# EAGLE board tenso (EAGLE 6.4)
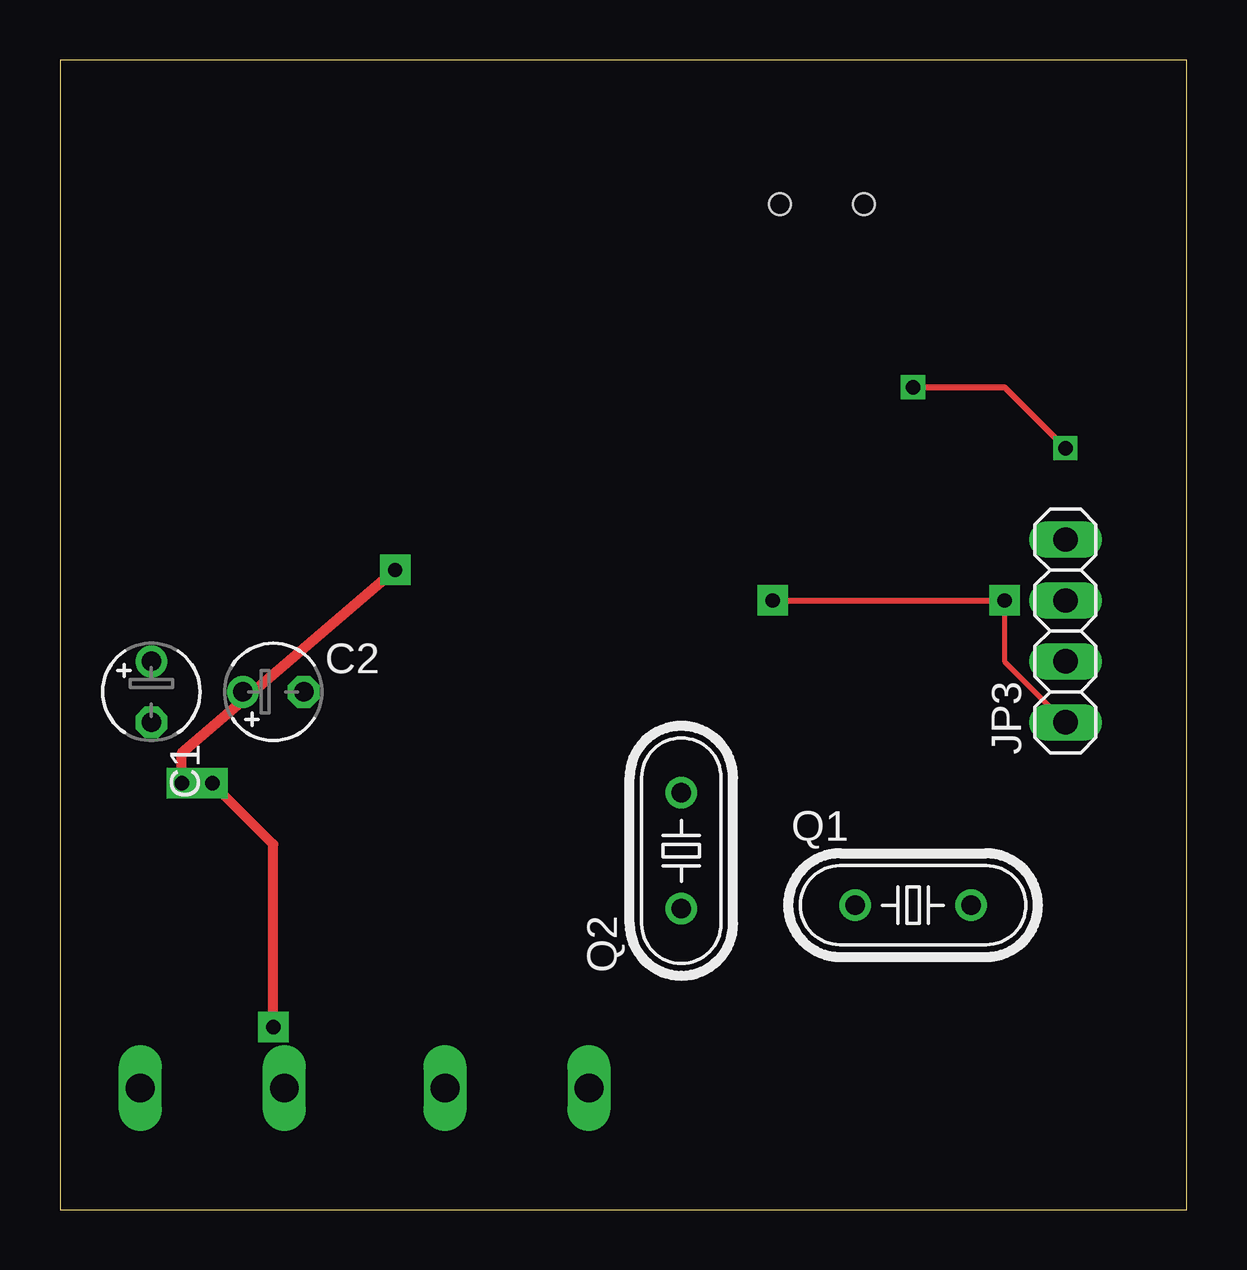
[diagram p0: board, top side]
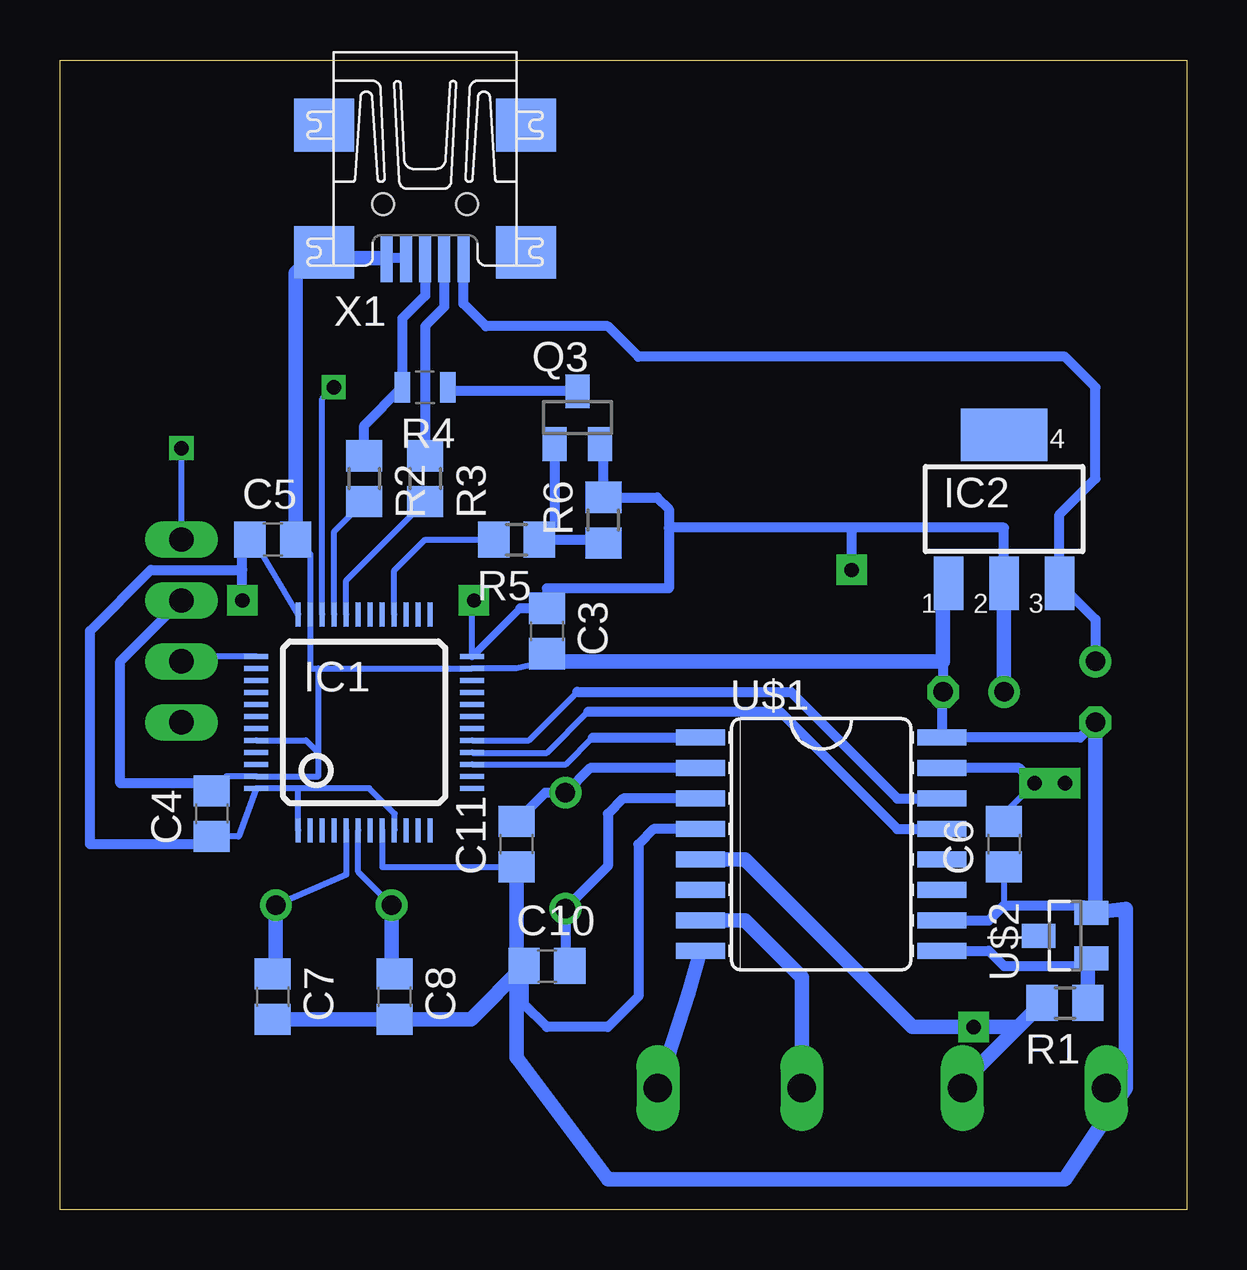
[diagram p1: board, bottom side, seen from below]

Size 46.97 x 47.93 mm. Coordinates in mm from the lower left corner, seen from the top.
Outline: 0,0 46.97,0 46.97,47.93 0,47.93 0,0
Copper layers (1*16): Top 0.035mm / dielectric 1.5mm / Bottom 0.035mm
Design rules "default *": minimum track width 0.2mm, minimum drill 0.6mm, track to track 0.2mm, track to pad 0.2mm, pad to pad 0.2mm, via to via 0.25mm, smd to smd 0.2mm, copper to edge 40mil, drill to drill 8mil, minimum pad ring 10mil, minimum via ring 8mil, stop-mask expansion 4mil, vias tented up to drill 0mil, thermal gap 10mil

## Footprints (pad centres in the part's own frame; a part is rotated, then mirrored left to right if it is on the bottom)
TT2D4 = drill 0.813: + -1.27,0 | drill 0.813 octagon: - 1.27,0
C0805 = smd 1.3 x 1.5: 1 -0.95,0; 2 0.95,0
TQFP48 = smd 0.2 x 1: 1 -2.75,-4.5; 2 -2.25,-4.5; 3 -1.75,-4.5; 4 -1.25,-4.5; 5 -0.75,-4.5; 6 -0.25,-4.5; 7 0.25,-4.5; 8 0.75,-4.5; 9 1.25,-4.5; 10 1.75,-4.5; 11 2.25,-4.5; 12 2.75,-4.5; 25 2.75,4.5; 26 2.25,4.5; 27 1.75,4.5; 28 1.25,4.5; 29 0.75,4.5; 30 0.25,4.5; 31 -0.25,4.5; 32 -0.75,4.5; 33 -1.25,4.5; 34 -1.75,4.5; 35 -2.25,4.5; 36 -2.75,4.5 | smd 1 x 0.2: 13 4.5,-2.75; 14 4.5,-2.25; 15 4.5,-1.75; 16 4.5,-1.25; 17 4.5,-0.75; 18 4.5,-0.25; 19 4.5,0.25; 20 4.5,0.75; 21 4.5,1.25; 22 4.5,1.75; 23 4.5,2.25; 24 4.5,2.75; 37 -4.5,2.75; 38 -4.5,2.25; 39 -4.5,1.75; 40 -4.5,1.25; 41 -4.5,0.75; 42 -4.5,0.25; 43 -4.5,-0.25; 44 -4.5,-0.75; 45 -4.5,-1.25; 46 -4.5,-1.75; 47 -4.5,-2.25; 48 -4.5,-2.75
SOT223 = smd 1.219 x 2.235: 1 -2.311,-3.099; 2 0,-3.099; 3 2.311,-3.099 | smd 3.6 x 2.2: 4 0,3.099
301X2 = drill 1.2 long: P$1 -3,0; P$2 3,0
1X04 = drill 1.016 long: 1 -3.81,0; 2 -1.27,0; 3 1.27,0; 4 3.81,0
HC49/S = drill 0.813: 1 -2.413,0; 2 2.413,0
SOT23 = smd 1 x 1.4: 1 -0.95,-1.1; 2 0.95,-1.1; 3 0,1.1
R0805 = smd 1.3 x 1.5: 1 -0.95,0; 2 0.95,0
C0805' = smd 0.635 x 1.27: 1 -0.95,0; 2 0.95,0
AD7705RNC = smd 0.66 x 2.032: 1 -4.445,-5.029; 2 -3.175,-5.029; 3 -1.905,-5.029; 4 -0.635,-5.029; 5 0.635,-5.029; 6 1.905,-5.029; 7 3.175,-5.029; 8 4.445,-5.029; 9 4.445,5.029; 10 3.175,5.029; 11 1.905,5.029; 12 0.635,5.029; 13 -0.635,5.029; 14 -1.905,5.029; 15 -3.175,5.029; 16 -4.445,5.029
UX60-MB-5ST = smd 2 x 0.5: 1 2.25,1.6; 2 2.25,0.8; 3 2.25,0; 4 2.25,-0.8; 5 2.25,-1.6 | smd 2.2 x 2.5: M1 -3.3,-4.2; M2 -3.3,4.2; M3 2,4.2; M4 2,-4.2 | hole 0.9: 0,-1.75; 0,1.75

## Placement (x,y rotation side)
C1  4u7  [TT2D4]  3.81,21.59 270 top
C2  4u7  [TT2D4]  8.89,21.59 0 top
C3  100n  [C0805]  26.67,24.13 270 bottom
C4  100n  [C0805]  40.64,16.51 90 bottom
C5  100n  [C0805]  38.1,27.94 0 bottom
C6  100n  [C0805]  7.62,15.24 90 bottom
C7  22p  [C0805]  38.1,8.89 270 bottom
C8  22p  [C0805]  33.02,8.89 270 bottom
C10  22p  [C0805]  26.67,10.16 0 bottom
C11  22p  [C0805]  27.94,15.24 90 bottom
IC1  STM32F10XCXT6  [TQFP48]  34.29,20.32 0 bottom
IC2  LM33  [SOT223]  7.62,29.21 0 bottom
JP1  AIN  [301X2]  19.05,5.08 180 top
JP2  APW  [301X2]  6.35,5.08 0 top
JP3  SWD  [1X04]  41.91,24.13 90 top
Q1  8M  [HC49/S]  35.56,12.7 0 top
Q2  4M  [HC49/S]  25.9,14.97 90 top
Q3  BCX71SMD  [SOT23]  25.4,33.02 0 bottom
R1  33k  [R0805]  5.08,8.62 180 bottom
R2  22  [R0805]  34.29,30.48 270 bottom
R3  22  [R0805]  31.75,30.48 270 bottom
R4  1k5  [C0805']  31.75,34.29 180 bottom
R5  1k  [R0805]  27.94,27.94 180 bottom
R6  10k  [R0805]  24.32,28.75 90 bottom
U$1  AD7705R-16  [AD7705RNC]  15.24,15.24 270 bottom
U$2  AD1580  [SOT23]  5.08,11.43 90 bottom
X1  MINI-USB-UX60-MB-5ST  [UX60-MB-5ST]  31.75,41.91 270 bottom

## Library data of the parts
C1-C8 C10 C11 R1-R3 R5 R6 = rcl
IC1 = stm32
IC2 = v-reg-3
JP1 JP2 = klemm
JP3 = pinhead
Q1 Q2 = crystal; OC_FARNELL: 1667008; OC_NEWARK: unknown
Q3 = transistor-pnp
R4 = rcl-s
U$1 U$2 = AD7705
X1 = con-hirose; OC_FARNELL: unknown; OC_NEWARK: unknown

## Nets
+3V3: C2.+ C3.1 C4.1 C5.1 C6.2 IC1.1 IC1.9 IC1.24 IC1.36 IC1.48 IC2.2 JP2.P$2 JP3.1 Q3.2 R1.2 R6.2 U$1.5 U$1.15
+5V: C1.+ IC2.3 X1.1
AIN+: JP1.P$2 U$1.7
AIN-: JP1.P$1 U$1.8
DI: IC1.17 U$1.14
DO: IC1.16 U$1.13
GND: C1.- C2.- C3.2 C4.2 C5.2 C6.1 C7.2 C8.2 C10.1 C11.1 IC1.8 IC1.23 IC1.35 IC1.44 IC1.47 IC2.1 JP2.P$1 JP3.3 U$1.4 U$1.10 U$1.16 U$2.2 X1.4 X1.5
N$3: C7.1 IC1.5 Q1.2
N$4: C8.1 IC1.6 Q1.1
N$5: C11.2 Q2.2 U$1.2
N$6: C10.2 Q2.1 U$1.3
N$7: R1.1 U$1.9 U$2.1
N$8: U$1.12
N$9: R2.1 R4.2 X1.3
N$10: R3.1 X1.2
N$12: Q3.3 R4.1
N$13: Q3.1 R5.1 R6.1
NRST: IC1.7
SCK: IC1.15 U$1.1
SWCLK: IC1.37 JP3.2
SWDIO: IC1.34 JP3.4
USB_DM: IC1.32 R3.2
USB_DP: IC1.33 R2.2
USB_EN: IC1.28 R5.2

## Tracks (layer width: path | path; a pad name or v marks a point on that pad's centre or on a via)
+3V3  (via drill 0.6 pad 1.27)
  Top 0.2: JP3.1 39.37,22.86 v39.37,25.4
  Top 0.254: v29.71,25.4 v39.37,25.4
  Top 0.406: v8.89,7.62 8.89,15.24 v6.35,17.78 | v5.08,17.78 5.08,19.05 v13.97,26.67
  Bottom 0.2: 40.64,15.24 C4.1
  Bottom 0.254: C4.1 39.53,15.56 IC1.48 37.04,17.57 | IC1.9 33.02,15.84 33.02,16.51 34.08,17.57 37.04,17.57 | IC1.1 37.04,17.57 | IC1.36 38.89,27.94 | IC1.24 29.79,24.82 v29.71,25.4 | 39.37,27.62 C5.1 | C6.2 7.62,16.51 v6.35,17.78
  Bottom 0.305: IC1.24 27.78,25.08
  Bottom 0.406: 27.78,25.08 C3.1 26.67,25.9 21.59,25.9 21.59,28.44 | 13.97,28.44 21.59,28.44 | R1.2 7.03,7.62 | U$1.15 6.99,18.41 v6.35,17.78 v5.08,17.78 | v13.97,26.67 13.97,28.44 | v39.37,25.4 39.37,26.67 | 39.37,26.67 39.37,27.62 | Q3.2 24.32,31.79 R6.2 22.08,29.7 21.59,29.21 21.59,28.44 | IC2.2 7.62,28.44 13.97,28.44 | 39.37,26.67 43.18,26.67 45.72,24.13 45.72,15.24 40.64,15.24
  Bottom 0.61: IC2.2 C2.+ | 7.03,7.62 v8.89,7.62 11.43,7.62 18.41,14.61 U$1.5 | 38.89,27.94 C5.1 | JP2.P$2 9.35,5.3 R1.2
+5V
  Bottom 0.406: X1.1 30.15,37.77 29.21,36.83 24.13,36.83 22.86,35.56 5.08,35.56 3.81,34.29 3.81,30.48 5.31,28.98 IC2.3 3.81,24.61 C1.+
AIN+
  Bottom 0.61: U$1.7 18.41,12.06 16.05,9.7 JP1.P$2
AIN-
  Bottom 0.61: U$1.8 20.78,9.01 JP1.P$1
DI
  Bottom 0.254: IC1.17 27.42,19.57 25.4,21.59
  Bottom 0.406: 25.4,21.59 16.51,21.59 12.06,17.14 U$1.14
DO
  Bottom 0.254: IC1.16 29.77,19.05 26.67,19.05 24.95,20.77
  Bottom 0.406: 24.95,20.77 16.96,20.77 12.06,15.88 U$1.13
GND
  Bottom 0.2: 40.64,17.78 C4.2
  Bottom 0.254: 26.67,22.86 27.94,22.57 IC1.23 36.19,22.57 | 36.19,22.57 36.54,22.57 IC1.35 36.54,27.33 C5.2 | 36.19,19.05 36.19,18.07 IC1.47 40.03,18.07 C4.2 | 36.19,19.05 36.19,22.57 | C6.1 7.62,12.7 | 3.81,12.7 U$2.2 | IC1.44 36.71,19.57 36.19,19.05 | IC1.8 33.54,14.29 C11.1
  Bottom 0.406: 13.74,22.86 13.97,22.86 | 27.94,13.97 27.94,10.48 C10.1 27.62,8.57 26.67,7.62 24.13,7.62 22.86,8.89 22.86,15.24 22.23,15.88 U$1.4 | U$1.10 8.26,12.06 7.62,12.7 4.3,12.7 U$2.2 | IC2.1 10.16,25.88 | 10.16,22.86 C2.- 10.21,21.54 U$1.16 4.45,19.68 C1.- | X1.4 X1.5 | JP3.3 44.45,22.86 44.45,17.78 40.64,17.78
  Bottom 0.61: C3.2 26.67,22.86 13.97,22.86 10.16,22.86 10.16,25.88 | C7.2 C8.2 29.84,7.94 C10.1 | C11.1 27.94,13.97 27.94,6.35 24.13,1.27 5.08,1.27 2.54,5.08 2.54,5.89 | 2.54,5.89 2.54,12.55 U$2.2 | X1.5 36.54,39.66 37.15,39.05 C5.2 | 3.81,12.7 C1.- | JP2.P$1 2.54,5.89
  cutout Bottom (isolate 0.813): 0,0 46.99,0 46.99,48.26 0,48.26
N$3
  Bottom 0.254: IC1.5 35.04,13.97 Q1.2
  Bottom 0.61: Q1.2 37.97,9.84 C7.1
N$4
  Bottom 0.254: Q1.1 34.54,14.09 IC1.6
  Bottom 0.61: Q1.1 33.15,9.84 C8.1
N$5
  Bottom 0.406: U$1.2 24.87,18.41 Q2.2 26.75,17.38 C11.2
N$6
  Bottom 0.406: U$1.3 23.5,17.14 24.13,16.51 24.13,14.33 Q2.1 25.9,10.34 C10.2
N$7
  Bottom 0.406: U$1.9 8.26,10.79 7.62,10.16 4.3,10.16 arc-90 U$2.1
  Bottom 0.61: U$2.1 4.13,10.33 R1.1
N$9
  Bottom 0.406: R2.1 34.29,32.7 R4.2 32.7,37.15 31.75,38.1 X1.3
N$10
  Bottom 0.406: X1.2 30.95,37.63 31.75,36.83 R3.1
N$12
  Bottom 0.406: Q3.3 30.63,34.12 R4.1
N$13
  Bottom 0.406: Q3.1 26.35,28.58 R5.1 24.46,27.94 R6.1
SCK
  Bottom 0.254: IC1.15 25.88,18.57 24.77,19.68
  Bottom 0.406: 24.77,19.68 U$1.1
SWCLK
  Bottom 0.254: IC1.37 41.7,23.07 JP3.2
SWDIO  (via drill 0.6)
  Top 0.254: v35.56,34.29 39.37,34.29 v41.91,31.75
  Bottom 0.254: IC1.34 36.04,33.81 v35.56,34.29 | v41.91,31.75 JP3.4
USB_DM
  Bottom 0.254: IC1.32 35.04,26.24 R3.2
USB_DP
  Bottom 0.254: IC1.33 35.54,28.28 R2.2
USB_EN
  Bottom 0.254: IC1.28 33.04,26.65 31.75,27.94 R5.2